# Altium PCB 150WStudioLight.PcbDoc
Units mm, origin at the board's own origin, x right, y up, seen from the top; angles counter-clockwise.
Board outline 40 x 84 mm, 2 copper layers (Top Layer, Bottom Layer); 68 components, 55 nets, 231 pads, 8 vias.
Unrouted connection lines stored in the file: 148.
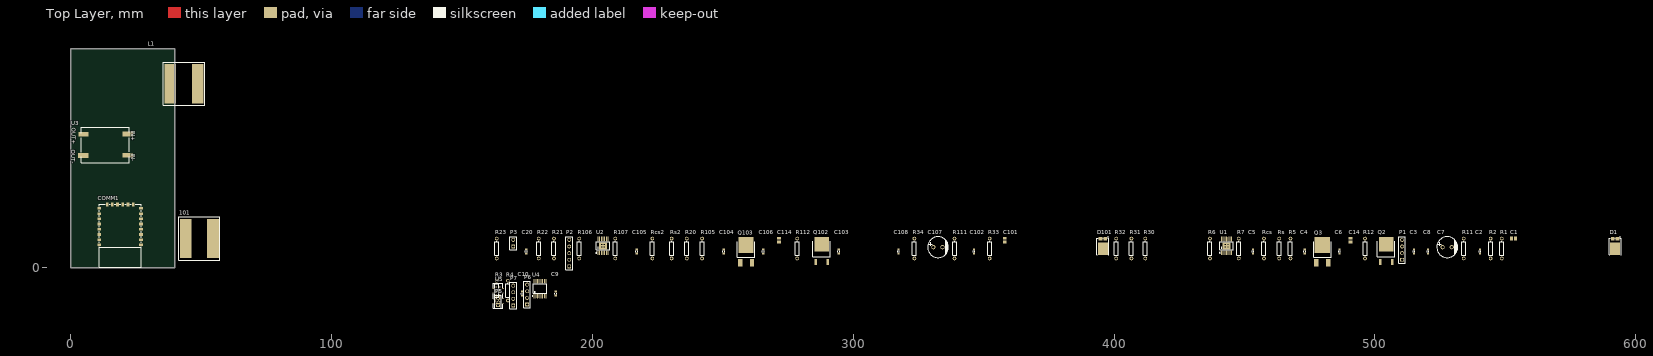
[diagram p0: Top Layer view]
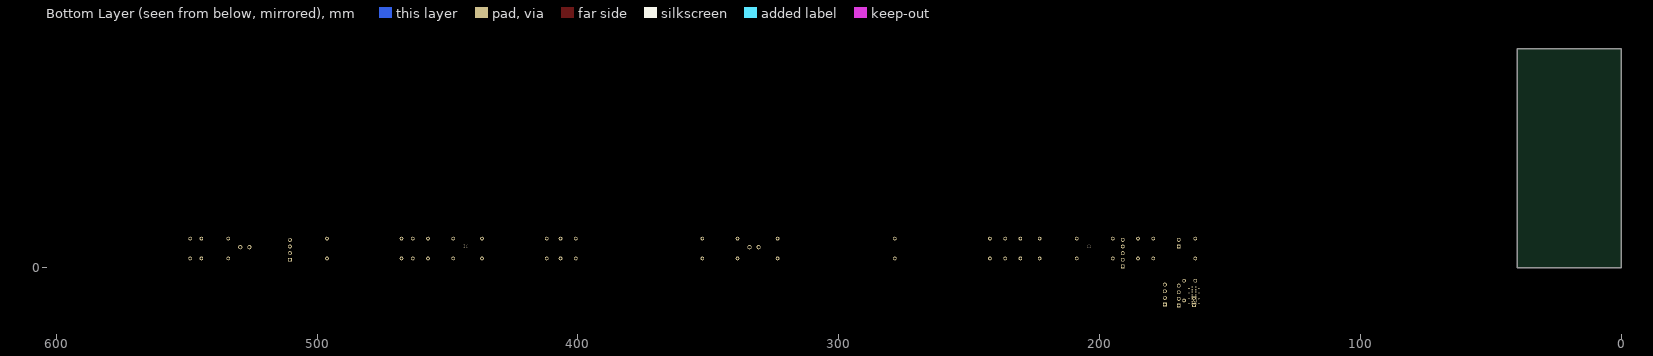
[diagram p1: Bottom Layer view, seen from below]

## Layer stack, top to bottom
Top Solder: solder mask 0.0102, Solder Resist, Dk 3.5
Top Layer: signal copper 0.0356
Dielectric 1: dielectric 0.32, FR-4, Dk 4.8
Bottom Layer: signal copper 0.0356
Bottom Solder: solder mask 0.0102, Solder Resist, Dk 3.5

## Board outline
0,84 0,0 40,0 40,84

## Design rules (kind name [scope] priority, off if disabled: settings)
Clearance [All] p1: gap=0.254 ignorepadtopadclearanceinfootprint=FALSE except(0: Arc-Hole Track-Hole SMDPad-Hole THPad-Hole Via-Hole Fill-Hole Poly-Hole Region-Hole Text-Hole)
PolygonConnect [All] p1: connectstyle=Relief reliefconductorwidth=0.254 reliefentries=4 polygonreliefangle="90 Angle" airgapwidth=0.254
RoomDefinition 150wStudioLight [InComponentClass('150wStudioLight')] p1: confinementstyle=ConfineIn formatcopy=TRUE lockcomponents=FALSE outline 162.306,-15.875 594.614,-15.875 594.614,14.732 162.306,14.732
RoutingVias [All] p1: holewidth=0.711 width=1.27 viastyle="Through Hole" minholewidth=0.711 minwidth=1.27 maxholewidth=0.711 maxwidth=1.27
SolderMaskExpansion [All] p1: expansion=0.102 istentingtop=FALSE
Width [All] p1: maxlimit=0.254 minlimit=0.254 preferedwidth=0.254
30 further rules are at their usual default settings.

## Components (designator, comment, footprint, x,y, rotation, side; value= is the part's Value field where it differs from the comment)
101 "FEXL1513A-220M" IND-SMD_L16.5-W15.5 49.363,11.201 r0 top value=22uH
C1 "" C0805 553.085,11.176 r0 top value=100¦ÌF
C2 "Cap" J1-0603 540.258,6.223 r90 top value=0.1¦ÌF
C3 "Cap" J1-0603 514.985,6.223 r90 top value=100¦ÌF
C4 "Cap" J1-0603 473.075,6.223 r90 top value=1nF
C5 "Cap" J1-0603 453.263,6.223 r90 top value=0.1¦ÌF
C6 "Cap" J1-0603 486.41,6.223 r90 top value=0.1¦ÌF
C7 "KM107M050F12RR0VH2FP0" CAP-TH_BD8.0-P3.50-D0.6-FD 527.685,7.874 r0 top value=100uF
C8 "Cap" J1-0603 520.319,6.223 r90 top value=0.1¦ÌF
C9 "Cap" J1-0603 185.928,-9.906 r90 top value=1¦ÌF
C10 "Cap" J1-0603 173.101,-9.906 r90 top value=1¦ÌF
C14 "Cap Pol3" C0805 490.601,10.541 r90 top value=1¦ÌF
C20 "Cap" J1-0603 174.625,6.223 r90 top value=0.1¦ÌF
C101 "" C0805 358.14,10.541 r90 top value=100¦ÌF
C102 "Cap" J1-0603 346.329,6.223 r90 top value=0.1¦ÌF
C103 "Cap" J1-0603 294.513,6.223 r90 top value=100¦ÌF
C104 "Cap" J1-0603 250.317,6.223 r90 top value=1nF
C105 "Cap" J1-0603 217.043,6.223 r90 top value=0.1¦ÌF
C106 "Cap" J1-0603 265.557,6.223 r90 top value=0.1¦ÌF
C107 "KM107M050F12RR0VH2FP0" CAP-TH_BD8.0-P3.50-D0.6-FD 332.486,7.874 r0 top value=100uF
C108 "Cap" J1-0603 317.373,6.223 r90 top value=0.1¦ÌF
C114 "Cap Pol3" C0805 271.526,10.541 r90 top value=1¦ÌF
COMM1 "PB-03F" BULETM-SMD_PB-03F 19,16.5 r180 top
D1 "ST20100L" TO-277_3P-L5.7-W4.2-LS6.5-BR 592.074,9.144 r90 top
D101 "ST20100L" TO-277_3P-L5.7-W4.2-LS6.5-BR 395.732,9.144 r90 top
L1 "FEXL1513A-220M" IND-SMD_L16.5-W15.5 43.5,70.5 r0 top value=22uH
P1 "CH340 Write" HDR1X4 510.413,3.048 r90 top
P2 "Encoder" HDR1X5 191.135,0.508 r90 top
P3 "Thermo" HDR1X2 169.672,8.128 r90 top
P5 "Switch" HDR1X2 163.83,-14.351 r90 top
P6 "Fan Header" HDR1X4 175.006,-14.097 r90 top
P7 "Display" HDR1X4 169.672,-14.478 r90 top
Q2 "AP40T10GH-VB" TO-252-2_L6.6-W6.1-P4.58-LS9.9-TL 504.317,5.588 r90 top
Q3 "NCE6020AK" TO-252-2_L6.6-W6.1-P4.57-LS10.1-TL-CW 479.806,5.334 r90 top
Q102 "AP40T10GH-VB" TO-252-2_L6.6-W6.1-P4.58-LS9.9-TL 287.909,5.588 r90 top
Q103 "NCE6020AK" TO-252-2_L6.6-W6.1-P4.57-LS10.1-TL-CW 258.953,5.334 r90 top
R1 "Res1" AXIAL-0.3 548.64,7.366 r90 top value=20K
R2 "Res1" AXIAL-0.3 544.322,7.366 r90 top value=3K
R3 "Res1" AXIAL-0.3 163.322,-8.763 r90 top value=5.1K
R4 "Res1" AXIAL-0.3 167.64,-8.763 r90 top value=5.1K
R5 "Res1" AXIAL-0.3 467.614,7.366 r90 top value=10K¦¸
R6 "Res1" AXIAL-0.3 436.753,7.366 r90 top value=10K¦¸
R7 "Res1" AXIAL-0.3 447.802,7.366 r90 top value=130K¦¸
R11 "Res1" AXIAL-0.3 534.035,7.366 r90 top value=150K¦¸
R12 "Res1" AXIAL-0.3 496.189,7.366 r90 top value=2.81K¦¸
R20 "Res1" AXIAL-0.3 236.22,7.366 r90 top value=10K
R21 "Res1" AXIAL-0.3 185.293,7.366 r90 top value=10K
R22 "Res1" AXIAL-0.3 179.451,7.366 r90 top value=10K
R23 "Res1" AXIAL-0.3 163.322,7.366 r90 top value=2K
R30 "Res1" AXIAL-0.3 411.988,7.366 r90 top value=100¦¸
R31 "Res1" AXIAL-0.3 406.654,7.366 r90 top value=100¦¸
R32 "Res1" AXIAL-0.3 400.812,7.366 r90 top value=100¦¸
R33 "Res1" AXIAL-0.3 352.298,7.366 r90 top value=100¦¸
R34 "Res1" AXIAL-0.3 323.469,7.366 r90 top value=100¦¸
R105 "Res1" AXIAL-0.3 242.062,7.366 r90 top value=10K¦¸
R106 "Res1" AXIAL-0.3 194.945,7.366 r90 top value=10K¦¸
R107 "Res1" AXIAL-0.3 208.788,7.366 r90 top value=130K¦¸
R111 "Res1" AXIAL-0.3 338.836,7.366 r90 top value=150K¦¸
R112 "Res1" AXIAL-0.3 278.511,7.366 r90 top value=2.81K¦¸
Rcs "Res1" AXIAL-0.3 457.454,7.366 r90 top value=6.4m¦¸
Rcs2 "Res1" AXIAL-0.3 223.012,7.366 r90 top value=6.4m¦¸
Rs "Res1" AXIAL-0.3 463.296,7.366 r90 top value=50m¦¸/3W
Rs2 "Res1" AXIAL-0.3 230.378,7.366 r90 top value=50m¦¸/3W
U1 "FP7209mR-G1" TSSOP-14_L5.0-W4.4-P0.65-LS6.4-BL-EP 443.103,8.382 r0 top
U2 "FP7209mR-G1" TSSOP-14_L5.0-W4.4-P0.65-LS6.4-BL-EP 204.089,8.382 r0 top
U3 "" "PCBComponent_1 - duplicate" 12.5,47 r180 top
U4 "IP2721" TSSOP-16_L5.0-W4.4-P0.65-LS6.4-BL 179.959,-8.001 r0 top
U5 "TYPE-C 16PLC-H10.0" TYPE-C-TH_16PLC-H10.0 163.83,-10.795 r90 top

## Footprints (in the part's own frame and the unit in brackets; to place one, negate y for a bottom-side part, rotate by r counter-clockwise, add the part's x,y. Pads: shape width x height; smd on the part's side, far side on the other; paste and mask are expansions set on the pad)
AXIAL-0.3 [mm] "Axial Device, Thru-Hole; 2 Leads; 0.3 in Pin Spacing"
  round 1.4 hole 0.85: 1(-3.81,0) 2(3.81,0)
  silkscreen extent -2.77,-0.76 2.77,0.76
BULETM-SMD_PB-03F [mm]
  rect 1.5x1 smd paste+0 mask+0.05: 1(-8,7.75) 2(-8,5.75) 3(-8,3.75) 4(-8,1.75) 5(-8,-0.25) 6(-8,-2.25) 7(-8,-4.25) 8(-8,-6.25) 15(8,-6.25) 16(8,-4.25) 17(8,-2.25) 18(8,-0.25) 19(8,1.75) 20(8,3.75) 21(8,5.75) 22(8,7.75)
  rect 1x1.5 smd paste+0 mask+0.05: 9(-5,-7.75) 10(-3,-7.75) 11(-1,-7.75) 12(1,-7.75) 13(3,-7.75) 14(5,-7.75)
  silkscreen extent -8,-7.75 8,16.25
C0805 [mm] "Chip Capacitor, Body 2.0x1.3mm, IPC High Density"
  rect 1.1x1.4 smd: 1(-0.75,0) 2(0.75,0)
  body extent -1.1,-0.72 1.1,0.72, height 1.4
CAP-TH_BD8.0-P3.50-D0.6-FD [mm]
  round 1.6 hole 1: 1(-1.75,0) 2(1.75,0)
  silkscreen extent -3.96,-4 4.04,4
HDR1X2 [mm] "Connector; Header; 2 Position"
  rect 1.5x1.5 hole 0.9: 1(0,0)
  round 1.5 hole 0.9: 2(2.54,0)
  silkscreen extent -1.27,-1.27 3.81,1.27
HDR1X4 [mm] "Connector; Header; 4 Position"
  rect 1.5x1.5 hole 0.9: 1(0,0)
  round 1.5 hole 0.9: 2(2.54,0) 3(5.08,0) 4(7.62,0)
  silkscreen extent -1.27,-1.27 8.89,1.27
HDR1X5 [mm] "Connector; Header; 5 Position"
  rect 1.5x1.5 hole 0.9: 1(0,0)
  round 1.5 hole 0.9: 2(2.54,0) 3(5.08,0) 4(7.62,0) 5(10.16,0)
  silkscreen extent -1.27,-1.27 11.43,1.27
IND-SMD_L16.5-W15.5 [mm]
  rect 4.5x15 smd: 1(5.25,0) 2(-5.25,0)
  silkscreen extent -7.9,-8.3 7.9,8.3
J1-0603 [mm] "Chip Resistor, Body 1.6x0.8mm, IPC High Density"
  rect 0.7x0.9 smd: 1(-0.75,0) 2(0.75,0)
  silkscreen extent -0.2,-0.35 0.2,0.35, body extent -0.85,-0.48 0.85,0.48, height 0.9
"PCBComponent_1 - duplicate" [mm]
  rect 4x1.8 smd paste+0 mask+0.051: 1(-9.335,3.867) 2(-9.335,-4.261) 3(7.683,3.994) 4(7.556,-4.134)
  silkscreen extent -9.97,-6.8 8.32,6.8
TO-252-2_L6.6-W6.1-P4.57-LS10.1-TL-CW [mm]
  rect 3x1.6 smd: 1(-3.424,2.285) 3(-3.424,-2.285)
  rect 6.2x5.8 smd: 2(3.424,0)
  silkscreen extent -1.38,-3.35 4.58,3.35
TO-252-2_L6.6-W6.1-P4.58-LS9.9-TL [mm]
  rect 2.409x0.979 smd: 1(-3.424,2.29) 3(-3.423,-2.29)
  rect 5.711x5.548 smd: 2(3.424,0)
  silkscreen extent -1.38,-3.35 4.58,3.35
TO-277_3P-L5.7-W4.2-LS6.5-BR [mm]
  rect 1.29x1.422 smd: 1(1.933,-0.93) 3(1.933,0.93)
  rect 4.8x3.8 smd: 2(-1.933,0)
  silkscreen extent -4.12,-2.28 2.72,2.34
TSSOP-14_L5.0-W4.4-P0.65-LS6.4-BL-EP [mm]
  oval 0.35x1.809 smd: 1(-1.95,-2.655) 2(-1.3,-2.655) 3(-0.65,-2.655) 4(0,-2.655) 5(0.65,-2.655) 6(1.3,-2.655) 7(1.95,-2.655) 8(1.95,2.655) 9(1.3,2.655) 10(0.65,2.655) 11(0,2.655) 12(-0.65,2.655) 13(-1.3,2.655) 14(-1.95,2.655)
  rect 3x2.65 smd: 15(0,0)
  silkscreen extent -2.73,-2.8 2.53,1.52
TSSOP-16_L5.0-W4.4-P0.65-LS6.4-BL [mm]
  oval 0.343x1.731 smd: 1(-2.275,-2.866) 2(-1.625,-2.866) 3(-0.975,-2.866) 4(-0.325,-2.866) 5(0.325,-2.866) 6(0.975,-2.866) 7(1.625,-2.866) 8(2.275,-2.866) 9(2.275,2.866) 10(1.625,2.866) 11(0.975,2.866) 12(0.325,2.866) 13(-0.325,2.866) 14(-0.975,2.866) 15(-1.625,2.866) 16(-2.275,2.866)
  silkscreen extent -3.05,-3.02 2.58,1.77
TYPE-C-TH_16PLC-H10.0 [mm]
  rect 0.62x0.62 hole 0.42 paste-2539.97 mask+0.05: A1(-3.25,0.7) A4(-2.3,0.7) A5(-1.35,0.7) A6(-0.45,0.7) A7(0.45,0.7) A8(1.35,0.7) A9(2.3,0.7) A12(3.25,0.7) B1(3.25,-0.7) B4(2.3,-0.7) B5(1.35,-0.7) B6(0.45,-0.7) B7(-0.45,-0.7) B8(-1.35,-0.7) B9(-2.3,-0.7) B12(-3.25,-0.7)
  oval 2x0.9 hole 0.5 slot 1.45 at 0 deg paste-2539.97 mask+0.05: A2(-2,1.93) A10(2,1.93) B2(2,-1.93) B10(-2,-1.93)
  silkscreen extent -4.75,-1.9 4.75,1.9

## Part data
101 L1: DC Resistance (DCR)=13.86m¦¸, JLCPCB Part Class="Extended Part", LCSC Part Name="22uH ¡À20% 22A", Manufacturer=cjiang(³¤½­Î¢µç), Rated Current=17A, Ratings=AEC-Q200, Saturation Current (Isat)=22A, Tolerance=¡À20%, Add into BOM=yes, Convert to PCB=yes, Datasheet=https://atta.szlcsc.com/upload/public/pdf/source/20230406/FF57C09F52BFC355BADE8D0321BD05F5.pdf, Device=FEXL1513A-220M, Manufacturer Part=FEXL1513A-220M, Supplier=LCSC, Supplier Footprint=SMD,16.5x15.5x12.7mm(1513), Supplier Part=C5378604, Symbol=FEXL1513A-220M, Type=Ò»Ìå³ÉÐÍµç¸Ð
C1 C101: library part "Cap Pol3", "Polarized Capacitor (Surface Mount)", LatestRevisionDate=29-May-2009, LatestRevisionNote="IPC-7351 Footprint Added.", PackageDescription="Chip Capacitor", PackageReference=C0805, Published=8-Jun-2000, Publisher="Altium Limited"
C2 C3 C4 C5 C6 C8 C9 C10 C20 C102 C103 C104 C105 C106 C108: "Capacitor", LatestRevisionDate=17-Jul-2002, LatestRevisionNote="Re-released for DXP Platform.", PackageDescription="Radial Cap, Thru-Hole; 2 Leads; 0.3 in Pin Spacing", PackageReference=RAD-0.3, Published=8-Jun-2000, Publisher="Altium Limited"
C7 C107: JLCPCB Part Class="Extended Part", LCSC Part Name="100uF ¡À20% 50V", Lifetime @ Temp=2000hrs@105¡æ, Manufacturer=CX(³ÐÐË), Rated Voltage=50V, Tolerance=¡À20%, Add into BOM=yes, Convert to PCB=yes, Datasheet=https://atta.szlcsc.com/upload/public/pdf/source/20211027/06D6BA3719C264B639DC286D935D03EA.pdf, Device=KM107M050F12RR0VH2FP0, L=12mm, Lead Spacing=3.5mm, Manufacturer Part=KM107M050F12RR0VH2FP0, Supplier=LCSC, Supplier Footprint=²å¼þ,D8xL12mm, Supplier Part=C2749, Symbol="50V 100uF 8X12", ¦ÕD=8mm
C14 C114: "Polarized Capacitor (Surface Mount)", LatestRevisionDate=29-May-2009, LatestRevisionNote="IPC-7351 Footprint Added.", PackageDescription="Chip Capacitor", PackageReference=C0805, Published=8-Jun-2000, Publisher="Altium Limited"
COMM1: JLCPCB Part Class="Extended Part", Manufacturer=Ai-Thinker(°²ÐÅ¿É), Add into BOM=yes, Convert to PCB=yes, Datasheet=https://atta.szlcsc.com/upload/public/pdf/source/20220707/D814A4298A3D5539355587756A11D322.pdf, Device=PB-03F, LCSC Part Name=PB-03F, Manufacturer Part=PB-03F, Supplier=LCSC, Supplier Footprint=SMD,16x24mm, Supplier Part=c, Symbol=PB-03F
D1 D101: Average Rectified Current (Io)=20A, Forward Voltage (Vf@If)=650mV@20A, JLCPCB Part Class="Extended Part", LCSC Part Name="µçÑ¹:100V µçÁ÷:20A", Manufacturer=CJ(½­ËÕ³¤µç/³¤¾§), Reverse Leakage Current (Ir)=30uA@100V, Reverse Voltage (Vr)=100V, Add into BOM=yes, Convert to PCB=yes, Datasheet=https://atta.szlcsc.com/upload/public/pdf/source/20210330/C2693410_9551F5ED840A67394421895091158B3C.pdf, Device=ST20100L, Diode Configuration=¶ÀÁ¢Ê½, Manufacturer Part=ST20100L, Supplier=LCSC, Supplier Footprint=TO-277, Supplier Part=C2693410, Symbol=ST20100L
P1 P6 P7: library part "Header 4", "Header, 4-Pin", LatestRevisionDate=17-Jul-2002, LatestRevisionNote="Re-released for DXP Platform.", Publisher="Altium Limited"
P2: library part "Header 5", "Header, 5-Pin", LatestRevisionDate=17-Jul-2002, LatestRevisionNote="Re-released for DXP Platform.", Publisher="Altium Limited"
P3 P5: library part "Header 2", "Header, 2-Pin", LatestRevisionDate=17-Jul-2002, LatestRevisionNote="Re-released for DXP Platform.", Publisher="Altium Limited"
Q2 Q102: Continuous Drain Current (Id)=40A, Drain Source On Resistance (RDS(on)@Vgs,Id)=30m¦¸@10V,40A, Drain Source Voltage (Vdss)=100V, Gate Threshold Voltage (Vgs(th)@Id)=-, JLCPCB Part Class="Extended Part", LCSC Part Name="N¹µµÀ ÄÍÑ¹:100V µçÁ÷:40A", Manufacturer=VBsemi(Î¢±Ì°ëµ¼Ìå), Add into BOM=yes, Convert to PCB=yes, Datasheet=https://atta.szlcsc.com/upload/public/pdf/source/20230505/1A0FD829F773C85C90E545D17A9CBDF0.pdf, Device=AP40T10GH-VB, Input Capacitance (Ciss@Vds)=-, Manufacturer Part=AP40T10GH-VB, Power Dissipation (Pd)=-, Reverse Transfer Capacitance (Crss@Vds)=-, Supplier=LCSC, Supplier Footprint=TO-252-2, Supplier Part=C693118, Symbol=AP40T10GH, Total Gate Charge (Qg@Vgs)=-, Type=N¹µµÀ
Q3 Q103: Continuous Drain Current (Id)=20A, Drain Source On Resistance (RDS(on)@Vgs,Id)=35m¦¸@10V,20A, Drain Source Voltage (Vdss)=60V, Gate Threshold Voltage (Vgs(th)@Id)=2.5V@250uA, JLCPCB Part Class="Extended Part", LCSC Part Name="N¹µµÀ ÄÍÑ¹:60V µçÁ÷:20A", Manufacturer=NCE(ÎÞÎýÐÂ½àÄÜ), Power Dissipation (Pd)=45W, Add into BOM=yes, Convert to PCB=yes, Datasheet=https://atta.szlcsc.com/upload/public/pdf/source/20231201/F7F8CF8E769EE35C01C69D8E45471040.pdf, Device=NCE6020AK, Manufacturer Part=NCE6020AK, Supplier=LCSC, Supplier Footprint=TO-252-2(DPAK), Supplier Part=C108639, Symbol=NCE6020AK, Type=N¹µµÀ
R1 R2 R3 R4 R5 R6 R7 R11 R12 R20 R21 R22 R23 R30 R31 R32 R33 R34 R105 R106 R107 R111 R112 Rcs Rcs2 Rs Rs2: "Resistor", LatestRevisionDate=17-Jul-2002, LatestRevisionNote="Re-released for DXP Platform.", PackageDescription="Axial Device, Thru-Hole; 2 Leads; 0.3 in Pin Spacing", PackageReference=AXIAL-0.3, Published=8-Jun-2000, Publisher="Altium Limited"
U1 U2: JLCPCB Part Class="Extended Part", Manufacturer="Advanced Analog Technology(Àà±È)", Add into BOM=yes, Convert to PCB=yes, Datasheet=https://atta.szlcsc.com/upload/public/pdf/source/20210915/BA17F30BBB4CEE378D5F258F3F58057A.pdf, Device=FP7209mR-G1, LCSC Part Name=FP7209mR-G1, Manufacturer Part=FP7209mR-G1, Supplier=LCSC, Supplier Footprint=TSSOP-14-EP, Supplier Part=C2762848, Symbol=FP7209MR-G1
U3: library part CN3903Ä£¿é, Device=CN3903
U4: JLCPCB Part Class="Extended Part", Manufacturer=INJOINIC(Ó¢¼¯Ð¾), Add into BOM=yes, Convert to PCB=yes, Datasheet=https://atta.szlcsc.com/upload/public/pdf/source/20200610/C603176_729C2C55A9E6451BDA9FCB913350E23E.pdf, Device=IP2721, LCSC Part Name=IP2721, Manufacturer Part=IP2721, Supplier=LCSC, Supplier Footprint=TSSOP-16, Supplier Part=C603176, Symbol=IP2721
U5: Current Rating - Power (Max)=5A, JLCPCB Part Class="Extended Part", LCSC Part Name="Type-C Ä¸ Ö±²å", Manufacturer="SHOU HAN(Ê×º«)", Operating Temperature Range=-40¡æ~+85¡æ, Add into BOM=yes, Connector Type=Type-C, Contact Material=-, Contact Plating=-, Convert to PCB=yes, Datasheet=https://atta.szlcsc.com/upload/public/pdf/source/20220627/08B499005F68E151B77B3CADC9182F41.pdf, Device="TYPE-C 16PLC-H10.0", Gender=Ä¸, Manufacturer Part="TYPE-C 16PLC-H10.0", Mounting Style=Ö±²å, Number of Contacts=16P, Number of Ports=1, Standard=-, Supplier=LCSC, Supplier Footprint=²å¼þ, Supplier Part=C3151747, Symbol="TYPE-C 16PLC-H10.0"

## Via types
v1: diameter 0.61, hole 0.305, Top Layer to Bottom Layer, 8 vias

## Nets (pads, with @x,y where several pads share a name; then routed paths per layer and width w, separated by ;. In a path a pad name is that pad's centre, name@x,y a point inside that pad or via, vN(x,y) a via of type N, cw(c..) or ccw(c..) an arc to the next point about the centre after c; other vN are vias at no path point)
GND: C1.2 C2.1 C3.2 C4.2 C5.1 C6.1 C7.2 C8.1 C9.2 C10.2 C14.2 C20.1 C101.2 C102.1 C103.2 C104.2 C105.1 C106.1 C107.2 C108.1 C114.2 COMM1.15 P1.4 P3.2 P6.4 P7.1 R2.1 R3.2 R4.2 R7.1 R12.2 R107.1 R112.2 Rcs2.1 Rcs.1 Rs2.1 Rs.1 U1.12 U1.13 U1.15 U2.12 U2.13 U2.15 U3.1 U3.3 U4.5 U5.A1 U5.A12 U5.B1 U5.B12
  other v1: 203.594,7.887 204.584,7.887 442.608,7.887 443.598,7.887 203.594,8.877 204.584,8.877 442.608,8.877 443.598,8.877
"LED1 +": C7.1 C8.2 D1.2 R11.2
"LED1 -": C14.1 Q3.2
"LED2 +": C107.1 C108.2 D101.2 R111.2
"LED2 -": C114.1 Q103.2
Net101_1: 101.1 D101.1 Q102.2
Net101_2: 101.2 C1.1 C2.2 C6.2 C101.1 C102.2 C106.2 L1.2 P5.1 P6.3 U1.11 U2.11 U3.2
NetC3_1: C3.1 U1.1
NetC4_1: C4.1 R5.1
NetC5_2: C5.2 U1.8
NetC9_1: C9.1 U4.2 U5.A4 U5.A9 U5.B4 U5.B9
NetC10_1: C10.1 P5.2 R1.2 U4.11 U4.16
NetC20_2: C20.2 P2.3 P2.5
NetC103_1: C103.1 U2.1
NetC104_1: C104.1 R105.1
NetC105_2: C105.2 U2.8
NetCOMM1_2: COMM1.2 R1.1 R2.2
NetCOMM1_3: COMM1.3 P2.4 R22.2
NetCOMM1_4: COMM1.4 R30.2
NetCOMM1_5: COMM1.5 R31.2
NetCOMM1_6: COMM1.6 R32.2
NetCOMM1_8: COMM1.8 P1.1 P7.2 R20.1 R21.1 R22.1 R23.2 U3.4
NetCOMM1_10: COMM1.10 P6.1
NetCOMM1_11: COMM1.11 P6.2
NetCOMM1_12: COMM1.12 R34.1
NetCOMM1_13: COMM1.13 R33.1
NetCOMM1_18: COMM1.18 P7.4
NetCOMM1_19: COMM1.19 P7.3
NetCOMM1_20: COMM1.20 P3.1 R23.1
NetCOMM1_21: COMM1.21 P1.3
NetCOMM1_22: COMM1.22 P1.2
NetD1_1: D1.1 L1.1 Q2.2
NetP2_1: P2.1 R20.2 R34.2
NetP2_2: P2.2 R21.2 R33.2
NetQ2_1: Q2.1 U1.14
NetQ2_3: Q2.3 Rcs.2 U1.10
NetQ3_1: Q3.1 U1.9
NetQ3_3: Q3.3 R6.1 Rs.2
NetQ102_1: Q102.1 U2.14
NetQ102_3: Q102.3 Rcs2.2 U2.10
NetQ103_1: Q103.1 U2.9
NetQ103_3: Q103.3 R106.1 Rs2.2
NetR3_1: R3.1 U4.12 U5.B5
NetR4_1: R4.1 U4.13 U5.A5
NetR5_2: R5.2 U1.4
NetR6_2: R6.2 U1.5
NetR7_2: R7.2 U1.7
NetR11_1: R11.1 R12.1 U1.6
NetR30_1: R30.1 U1.3 U2.3
NetR31_1: R31.1 U1.2
NetR32_1: R32.1 U2.2
NetR105_2: R105.2 U2.4
NetR106_2: R106.2 U2.5
NetR107_2: R107.2 U2.7
NetR111_1: R111.1 R112.1 U2.6
pads on no net: COMM1.1 COMM1.7 COMM1.9 COMM1.14 COMM1.16 COMM1.17 D1.3 D101.3 U4.1 U4.3 U4.4 U4.6 U4.7 U4.8 U4.9 U4.10 U4.14 U4.15 U5.A2 U5.A6 U5.A7 U5.A8 U5.A10 U5.B2 U5.B6 U5.B7 U5.B8 U5.B10

## Text inside footprints (layer, text, board x,y; h text height)
U3: Top Overlay "OUT+" at 0.383,53.674 h1.5 r270; Top Overlay "OUT-" at 0.257,45.165 h1.5 r270; Top Overlay "IN+" at 23.243,52.531 h1.5 r270; Top Overlay "IN-" at 23.243,43.768 h1.5 r270